# EAGLE board disp_adapter (EAGLE 5.07)
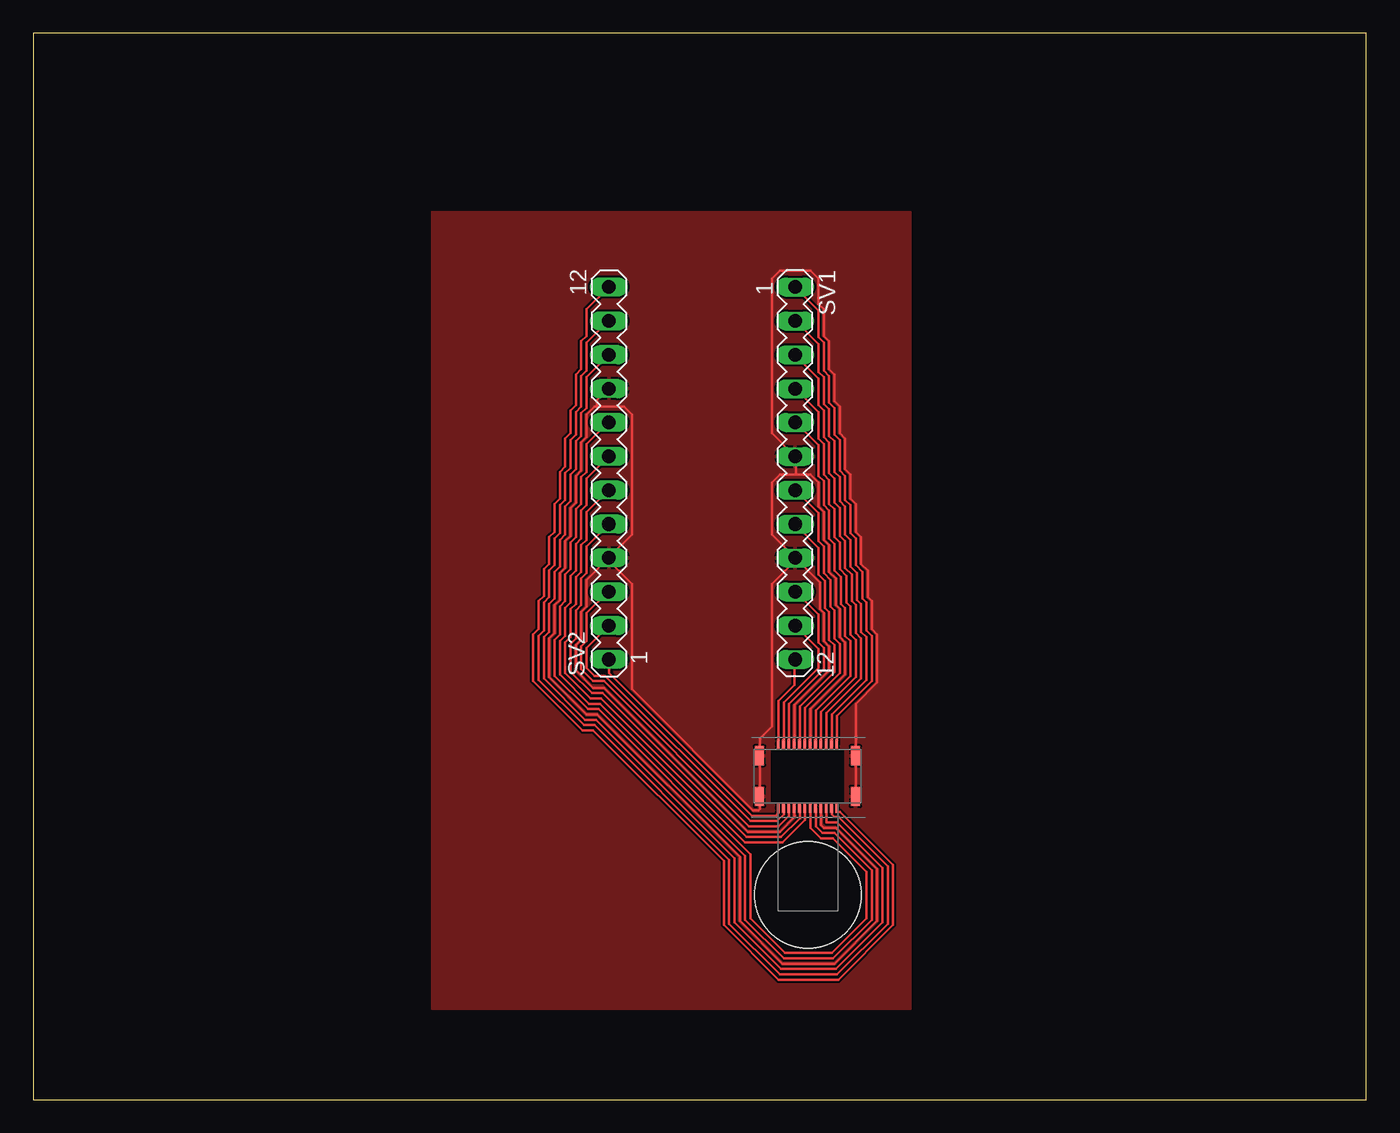
[diagram p0: board, top side]

Size 100 x 80 mm. Coordinates in mm from the lower left corner, seen from the top.
Outline: 0,0 100,0 100,80 0,80 0,0
Copper layers (1*16): Top 0.035mm / dielectric 1.5mm / Bottom 0.035mm
Design rules "Fischer-LP": minimum track width 0.15mm, minimum drill 0.3mm, track to track 0.15mm, track to pad 0.15mm, pad to pad 0.15mm, via to via 0.15mm, smd to smd 0mil, copper to edge 0.2mm, drill to drill 0.3mm, minimum pad ring 0.2mm, minimum via ring 0.15mm, stop-mask expansion 0.15mm, vias tented up to drill 0.5mm, thermal gap 0.15mm
Net classes: 0 default: width 0.2 mm

## Footprints (pad centres in the part's own frame; a part is rotated, then mirrored left to right if it is on the bottom)
MA12-1 = drill 1.016 long: 1 -13.97,0; 2 -11.43,0; 3 -8.89,0; 4 -6.35,0; 5 -3.81,0; 6 -1.27,0; 7 1.27,0; 8 3.81,0; 9 6.35,0; 10 8.89,0; 11 11.43,0; 12 13.97,0
SONY_ACX559AKN-7_A = smd 0.2 x 0.7: P$1 0,0; P$2 0.4,0; P$3 0.8,0; P$4 1.2,0; P$5 1.6,0; P$6 2,0; P$7 2.4,0; P$8 2.8,0; P$9 3.2,0; P$10 3.6,0; P$11 4,0; P$12 4.4,0; P$13 4.4,-4.8; P$14 4,-4.8; P$15 3.6,-4.8; P$16 3.2,-4.8; P$17 2.8,-4.8; P$18 2.4,-4.8; P$19 2,-4.8; P$20 1.6,-4.8; P$21 1.2,-4.8; P$22 0.8,-4.8; P$23 0.4,-4.8; P$24 0,-4.8 | smd 0.7 x 1.45: P$25 5.8,-0.875; P$26 5.8,-3.925; P$27 -1.4,-3.925; P$28 -1.4,-0.875 | hole 8: 2.25,-11.3

## Placement (x,y rotation side)
SV1  [MA12-1]  57.15,46.99 270 top
SV2  [MA12-1]  43.18,46.99 90 top
U$1  SONY_ACX559AKN-7DN  [SONY_ACX559AKN-7_A]  55.88,26.67 0 top

## Library data of the parts
SV1 SV2 = con-lstb
U$1 = Fabian

## Nets
N$1: SV1.1 U$1.P$12
N$2: SV1.2 U$1.P$11
N$3: SV1.3 U$1.P$10
N$4: SV1.4 U$1.P$9
N$5: SV1.5 U$1.P$8
N$7: SV1.7 U$1.P$6
N$8: SV1.8 U$1.P$5
N$10: SV1.10 U$1.P$3
N$11: SV1.11 U$1.P$2
N$12: SV1.12 U$1.P$1
N$13: SV2.1 U$1.P$24
N$14: SV2.2 U$1.P$23
N$15: SV2.3 U$1.P$22
N$17: SV2.5 U$1.P$20
N$18: SV2.6 U$1.P$19
N$19: SV2.7 U$1.P$18
N$20: SV2.8 U$1.P$17
N$21: SV1.6 SV1.9 SV2.4 SV2.9 U$1.P$4 U$1.P$7 U$1.P$16 U$1.P$21 U$1.P$25 U$1.P$26 U$1.P$27 U$1.P$28
N$22: SV2.10 U$1.P$15
N$23: SV2.11 U$1.P$14
N$24: SV2.12 U$1.P$13

## Tracks (layer width: path | path; a pad name or v marks a point on that pad's centre or on a via)
N$1
  Top 0.2: U$1.P$12 60.3,26.7 60.3,28.8 62.9,31.4 62.9,34.8 62.5,35.2 62.5,37.3 62.2,37.6 62.2,39.6 61.7,40.1 61.7,42.1 61.3,42.5 61.3,44.6 60.9,45 60.9,46.8 60.5,47.2 60.5,49.5 60.1,49.9 60.1,51.9 59.7,52.3 59.7,54.3 59.3,54.7 59.3,56.8 58.9,57.2 58.9,59.2 57.2,60.9 SV1.1
N$2
  Top 0.2: U$1.P$11 59.9,26.7 59.9,28.9 62.5,31.5 62.5,34.7 62.1,35.1 62.1,37.2 61.8,37.5 61.8,39.5 61.3,40 61.3,42 60.9,42.4 60.9,44.5 60.5,44.9 60.5,46.7 60.1,47.1 60.1,49.4 59.7,49.8 59.7,51.8 59.3,52.2 59.3,54.2 58.9,54.6 58.9,56.7 57.2,58.4 SV1.2
N$3
  Top 0.2: U$1.P$10 59.5,26.7 59.5,29 62.1,31.6 62.1,34.6 61.7,35 61.7,37.1 61.4,37.4 61.4,39.4 60.9,39.9 60.9,41.9 60.5,42.3 60.5,44.4 60.1,44.8 60.1,46.6 59.7,47 59.7,49.3 59.3,49.7 59.3,51.7 58.9,52.1 58.9,54.1 57.2,55.8 SV1.3
N$4
  Top 0.2: U$1.P$9 59.1,26.7 59.1,29.1 61.7,31.7 61.7,34.5 61.3,34.9 61.3,37 61,37.3 61,39.3 60.5,39.8 60.5,41.8 60.1,42.2 60.1,44.3 59.7,44.7 59.7,46.5 59.3,46.9 59.3,49.2 58.9,49.6 58.9,51.6 57.2,53.3 SV1.4
N$5
  Top 0.2: U$1.P$8 58.7,26.7 58.7,29.2 61.3,31.8 61.3,34.4 60.9,34.8 60.9,36.9 60.6,37.2 60.6,39.2 60.1,39.7 60.1,41.7 59.7,42.1 59.7,44.2 59.3,44.6 59.3,46.4 58.9,46.8 58.9,49.1 57.2,50.8 SV1.5
N$7
  Top 0.2: U$1.P$6 57.9,26.7 57.9,29.4 60.5,32 60.5,34.2 60.1,34.6 60.1,36.7 59.8,37 59.8,39 59.3,39.5 59.3,41.5 58.9,41.9 58.9,44 57.2,45.7 SV1.7
N$8
  Top 0.2: U$1.P$5 57.5,26.7 57.5,29.5 60.1,32.1 60.1,34.1 59.7,34.5 59.7,36.6 59.4,36.9 59.4,38.9 58.9,39.4 58.9,41.4 57.2,43.1 SV1.8
N$10
  Top 0.2: U$1.P$3 56.7,26.7 56.7,29.7 59.3,32.3 59.3,33.9 58.9,34.3 58.9,36.4 57.2,38.1 SV1.10
N$11
  Top 0.2: U$1.P$2 56.3,26.7 56.3,29.8 58.9,32.4 58.9,33.8 57.2,35.5 SV1.11
N$12
  Top 0.2: U$1.P$1 55.9,26.7 55.9,29.9 57.1,31.1 57.1,33 SV1.12
N$13
  Top 0.2: SV2.1 43.2,33 43.2,32 53.9,21.3 55.7,21.3 55.9,21.5 55.9,21.8 U$1.P$24
N$14
  Top 0.2: U$1.P$23 56.3,21.8 56.3,21.4 55.8,20.9 53.8,20.9 42.9,31.8 42.1,31.8 41.5,32.4 41.5,33.9 43.1,35.5 SV2.2
N$15
  Top 0.2: U$1.P$22 56.7,21.8 56.7,21.3 55.9,20.5 53.7,20.5 42.8,31.4 42,31.4 41.1,32.3 41.1,34 41.5,34.4 41.5,36.5 43.1,38.1 SV2.3
N$17
  Top 0.2: U$1.P$20 57.5,21.8 57.5,21.1 56.1,19.7 53.5,19.7 42.7,30.5 41.9,30.5 40.3,32.1 40.3,34.2 40.7,34.6 40.7,36.7 41.1,37.1 41.1,39.1 41.5,39.5 41.5,41.5 SV2.5
N$18
  Top 0.2: U$1.P$19 57.9,21.8 57.9,21 56.2,19.3 53.4,19.3 42.6,30.1 41.8,30.1 39.9,32 39.9,34.3 40.3,34.7 40.3,36.8 40.7,37.2 40.7,39.2 41.1,39.6 41.1,41.6 41.5,42 41.5,44.1 43.1,45.7 SV2.6
N$19
  Top 0.2: U$1.P$18 58.3,21.8 58.3,20.4 59.1,19.6 60,19.6 62.5,17.1 62.5,13.6 59.9,11 56.4,11 53.8,13.6 53.8,18.4 42.5,29.7 41.7,29.7 39.5,31.9 39.5,34.4 39.9,34.8 39.9,36.9 40.3,37.3 40.3,39.3 40.7,39.7 40.7,41.7 41.1,42.1 41.1,44.2 41.5,44.6 41.5,46.6 43.1,48.2 SV2.7
N$20
  Top 0.2: U$1.P$17 58.7,21.8 58.7,20.5 59.2,20 60.1,20 62.9,17.2 62.9,13.5 60,10.6 56.3,10.6 53.4,13.5 53.4,18.3 42.4,29.3 41.6,29.3 39.1,31.8 39.1,34.5 39.5,34.9 39.5,37 39.9,37.4 39.9,39.4 40.3,39.8 40.3,41.8 40.7,42.2 40.7,44.3 41.1,44.7 41.1,46.7 41.5,47.1 41.5,49.2 43.1,50.8 SV2.8
N$21
  Top 0.2: U$1.P$21 57.1,21.8 57.1,21.2 56,20.1 53.6,20.1 42.8,30.9 42,30.9 40.7,32.2 40.7,34.1 41.1,34.5 41.1,36.6 41.5,37 41.5,39 43.1,40.6 SV2.4 | U$1.P$16 59.1,21.8 59.1,20.6 59.3,20.4 60.2,20.4 63.3,17.3 63.3,13.4 60.1,10.2 56.2,10.2 53,13.4 53,18.2 42.3,28.9 41.5,28.9 38.7,31.7 38.7,34.6 39.1,35 39.1,37.1 39.5,37.5 39.5,39.5 39.9,39.9 39.9,41.9 40.3,42.3 40.3,44.4 40.7,44.8 40.7,46.8 41.1,47.2 41.1,49.3 41.5,49.7 41.5,51.4 42.1,52 42.3,52 | 42.3,52 44.3,52 44.9,51.4 44.9,42.4 43.2,40.7 SV2.4 | SV2.9 43.1,53.3 42.3,52.5 42.3,52 | U$1.P$4 57.1,26.7 57.1,29.6 59.7,32.2 59.7,34 59.3,34.4 59.3,36.5 59,36.8 59,38.8 57.2,40.6 SV1.9 | U$1.P$7 58.3,26.7 58.3,29.3 60.9,31.9 60.9,34.3 60.5,34.7 60.5,36.8 60.2,37.1 60.2,39.1 59.7,39.6 59.7,41.6 59.3,42 59.3,44.1 58.9,44.5 58.9,46.3 58.3,46.9 57.2,46.9 | 57.2,46.9 56,46.9 55.4,46.3 55.4,42.4 57.1,40.7 SV1.9 | 57.2,46.9 57.2,48.2 SV1.6 57.1,48.3 55.4,50 55.4,61.6 56,62.2 58.3,62.2 58.9,61.6 58.9,59.7 59.3,59.3 59.3,57.3 59.7,56.9 59.7,54.8 60.1,54.4 60.1,52.4 60.5,52 60.5,50 60.9,49.6 60.9,47.3 61.3,46.9 61.3,45.1 61.7,44.7 61.7,42.6 62.1,42.2 62.1,40.2 62.6,39.7 62.6,37.7 62.9,37.4 62.9,35.3 63.3,34.9 63.3,31.3 61.7,29.7 61.7,25.9 U$1.P$25 61.7,25.7 61.7,22.8 U$1.P$26 | SV1.9 57.2,40.5 55.4,38.7 55.4,28 54.5,27.1 54.5,25.9 U$1.P$28 54.5,25.7 54.5,22.8 U$1.P$27 54.5,22.7 54.5,21.8 54.4,21.7 54,21.7 44.9,30.8 44.9,38.7 43.1,40.5 SV2.4
  pour Top: 29.9,66.6 65.8,66.6 65.8,6.8 29.9,6.8
N$22
  Top 0.2: U$1.P$15 59.5,21.8 59.5,20.8 60.3,20.8 63.7,17.4 63.7,13.3 60.2,9.8 56.1,9.8 52.6,13.3 52.6,18.1 42.2,28.5 41.4,28.5 38.3,31.6 38.3,34.7 38.7,35.1 38.7,37.2 39.1,37.6 39.1,39.6 39.5,40 39.5,42 39.9,42.4 39.9,44.5 40.3,44.9 40.3,46.9 40.7,47.3 40.7,49.4 41.1,49.8 41.1,51.5 41.5,51.9 41.5,54.2 SV2.10
N$23
  Top 0.2: U$1.P$14 59.9,21.8 59.9,21.4 60.1,21.2 60.4,21.2 64.1,17.5 64.1,13.2 60.3,9.4 56,9.4 52.2,13.2 52.2,18 42.1,28.1 41.3,28.1 37.9,31.5 37.9,34.8 38.3,35.2 38.3,37.3 38.7,37.7 38.7,39.7 39.1,40.1 39.1,42.1 39.5,42.5 39.5,44.6 39.9,45 39.9,47 40.3,47.4 40.3,49.5 40.7,49.9 40.7,51.6 41.1,52 41.1,54.3 41.5,54.7 41.5,56.8 43.1,58.4 SV2.11
N$24
  Top 0.2: U$1.P$13 60.3,21.8 60.3,21.6 60.5,21.6 64.5,17.6 64.5,13.1 60.4,9 55.9,9 51.8,13.1 51.8,17.9 42,27.7 41.2,27.7 37.5,31.4 37.5,34.9 37.9,35.3 37.9,37.4 38.3,37.8 38.3,39.8 38.7,40.2 38.7,42.2 39.1,42.6 39.1,44.7 39.5,45.1 39.5,47.1 39.9,47.5 39.9,49.6 40.3,50 40.3,51.7 40.7,52.1 40.7,54.4 41.1,54.8 41.1,56.9 41.5,57.3 41.5,59.3 43.1,60.9 SV2.12